# Altium PCB PCB1.PcbDoc
Units mil, origin at the board's own origin, x right, y up, seen from the top; angles counter-clockwise.
Board outline 2925 x 2520 mil, 2 copper layers (Top Layer, Bottom Layer); 12 components, 6 nets, 26 pads, 7 vias.
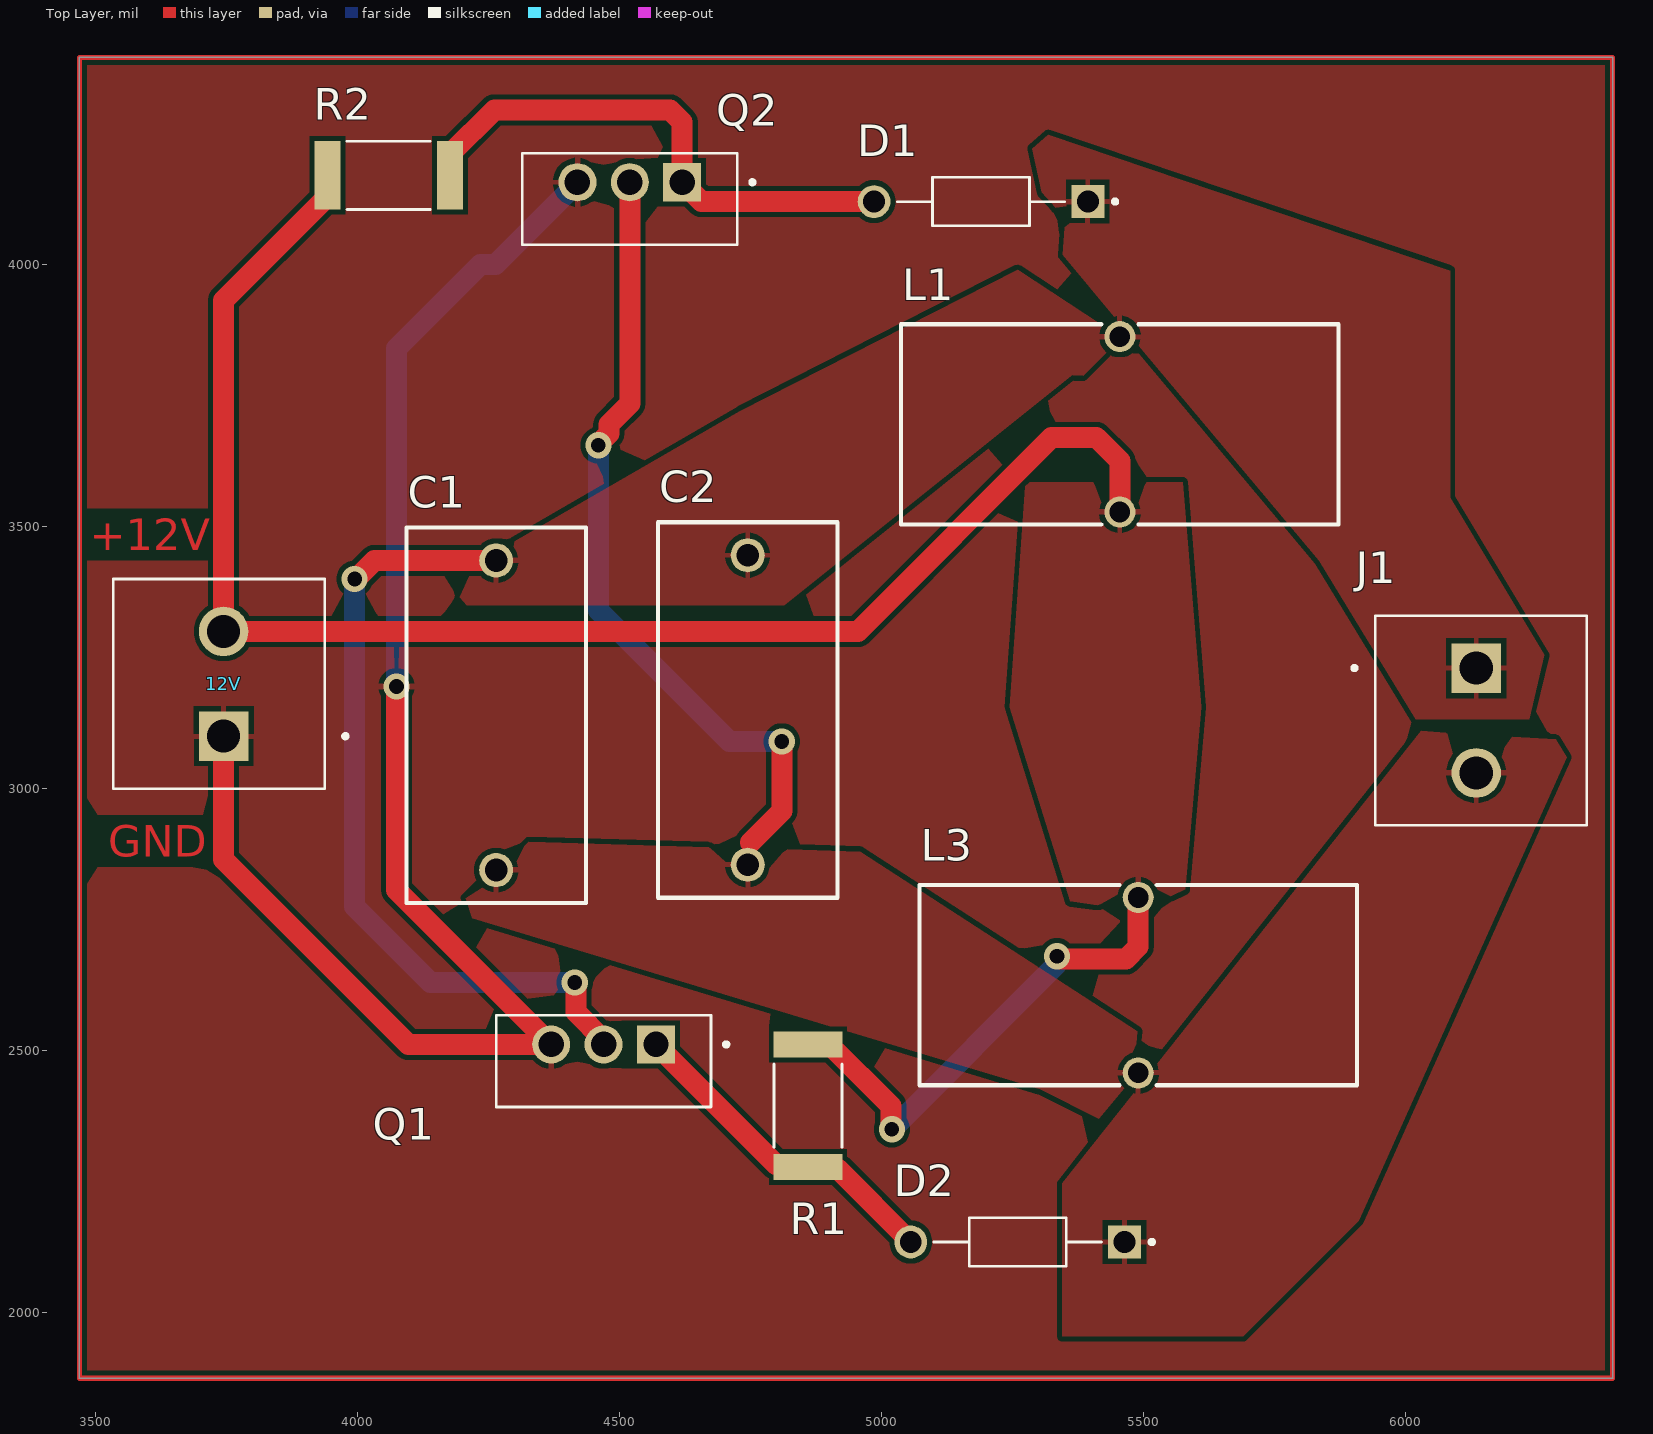
[diagram p0: Top Layer view]
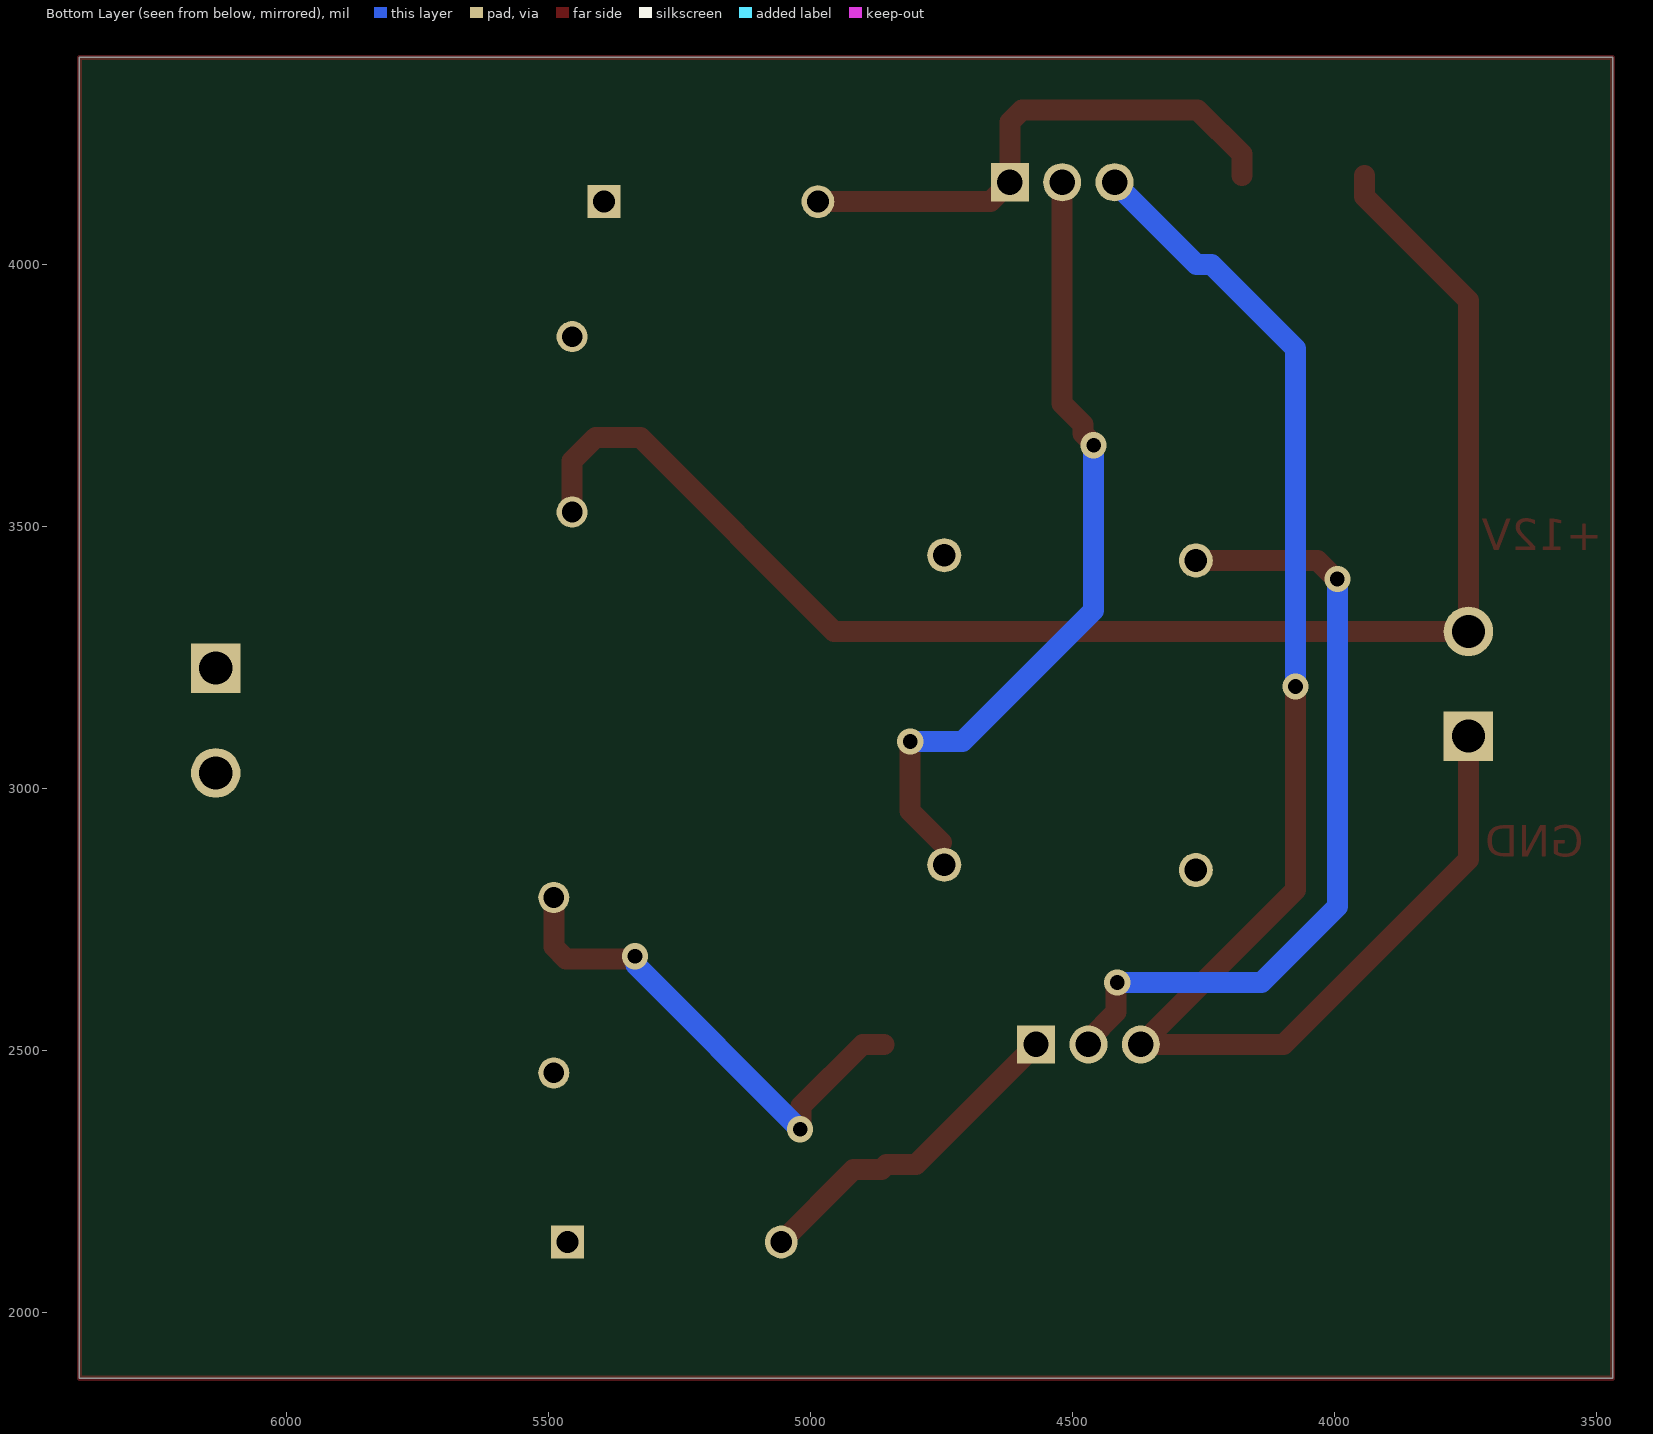
[diagram p1: Bottom Layer view, seen from below]
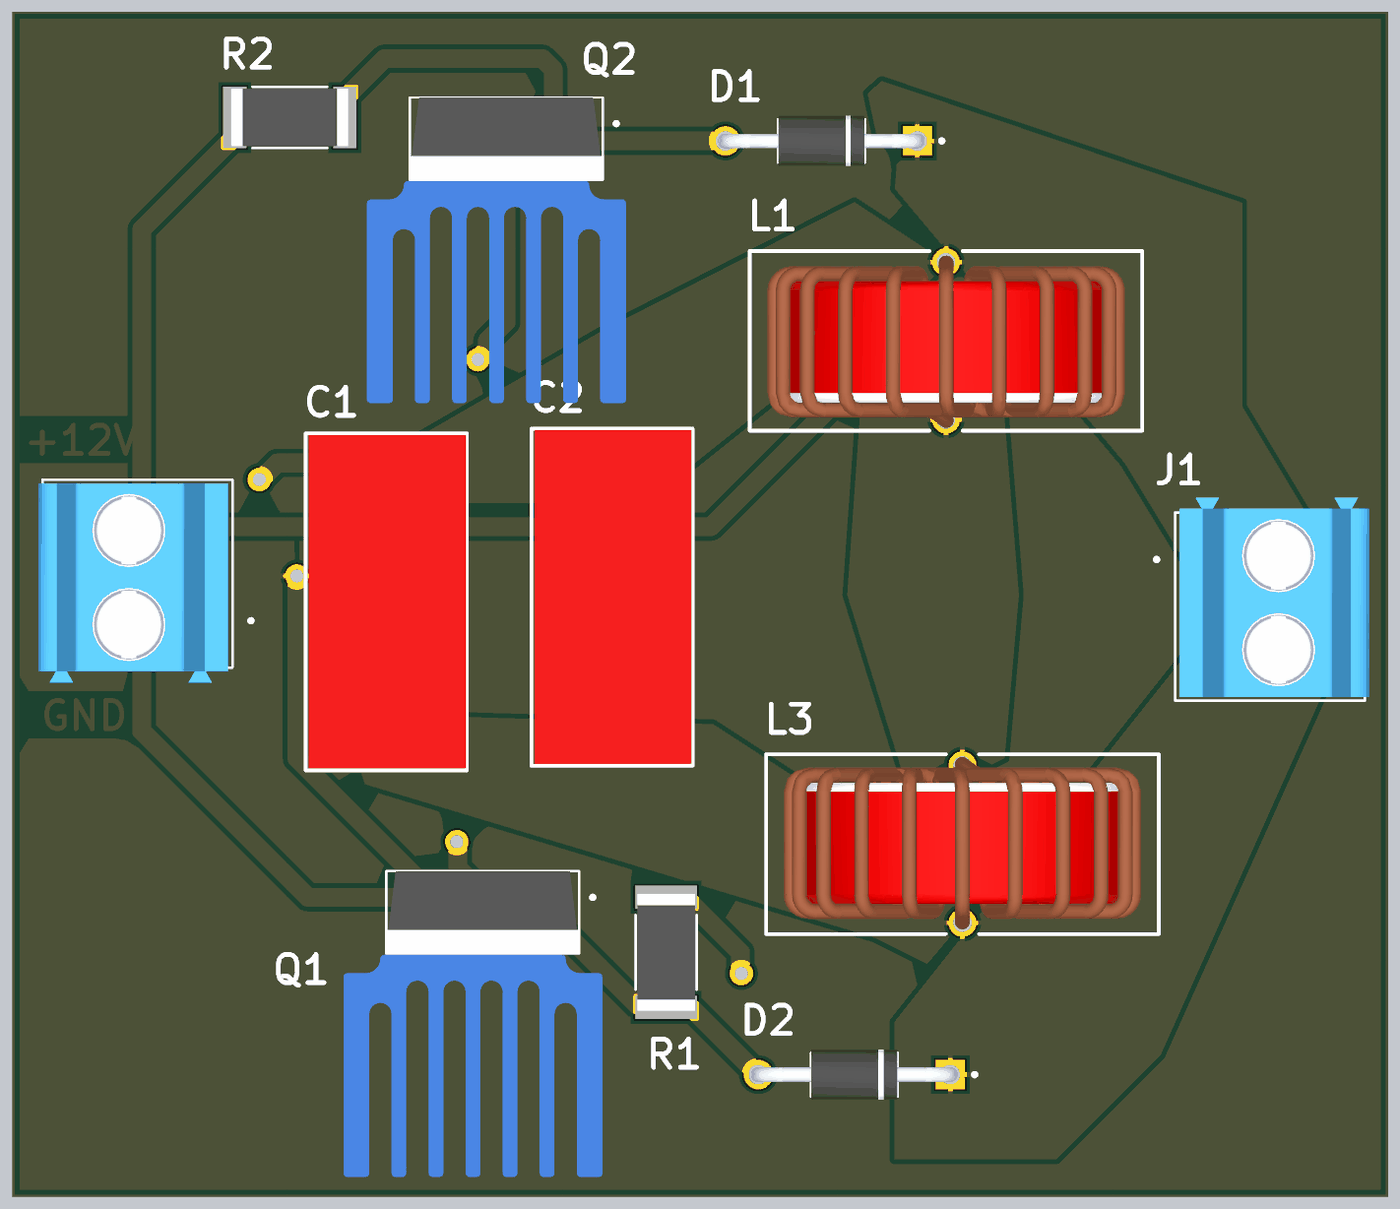
[diagram p2: 3D render of the assembled board from above, using the file's embedded part models]

## Layer stack, top to bottom
Top Solder: solder mask 0.4, Solder Resist, Dk 3.5
Top Layer: signal copper 1.4
Dielectric 1: dielectric 12.6, FR-4, Dk 4.8
Bottom Layer: signal copper 1.4
Bottom Solder: solder mask 0.4, Solder Resist, Dk 3.5

## Board outline
3470,1875 3470,4395 6395,4395 6395,1875

## Design rules (kind name [scope] priority, off if disabled: settings)
Clearance [All] p1: gap=10 ignorepadtopadclearanceinfootprint=FALSE
PolygonConnect [All] p1: connectstyle=Relief reliefconductorwidth=10 reliefentries=4 polygonreliefangle="90 Angle" airgapwidth=10
RoutingVias [All] p1: holewidth=28 width=50 viastyle="Through Hole" minholewidth=28 minwidth=50 maxholewidth=28 maxwidth=50
SolderMaskExpansion [All] p1: expansion=4 istentingtop=FALSE
SupplyNets "Schematic Supply Nets_1" [InNet('+12')] p1: voltage=0.000
SupplyNets "Schematic Supply Nets" [InNet('GND')] p2: voltage=0.000
Width [All] p1: maxlimit=40 minlimit=40 preferedwidth=40 minimp=50.000000 maximp=50.000000 favimp=50.000000
30 further rules are at their usual default settings.

## Components (designator, comment, footprint, x,y, rotation, side; value= is the part's Value field where it differs from the comment)
12V "IN" CUI_TB007-508-02BE 3745,3100 r90 top (schematic designator J2)
C1 "330nF" WCAP-FTX2_P15L18W8.5H14.5_CS 4265,3140 r90 top
C2 "330nF" WCAP-FTX2_P15L18W8.5H14.5_CS 4745,3150 r90 top
D1 "UF4007" DIOAD1036W78L470D235 5190,4120 r180 top
D2 "UF4007" DIOAD1036W78L470D235 5260,2135 r180 top
J1 "OUT" CUI_TB007-508-02BE 6135,3230 r270 top
L1 "100uH" WE-SI_744132 5455,3695 r90 top
L3 "100uH" WE-SI_744132 5490,2625 r270 top
Q1 "IRF540N" TO254P1054X469X1930-3 4470,2480 r180 top
Q2 "IRF540N" TO254P1054X469X1930-3 4520,4125 r180 top
R1 "220" RESC6331X75N 4860,2395 r270 top
R2 "220" RESC6331X75N 4060,4170 r0 top

## Footprints (in the part's own frame and the unit in brackets; to place one, negate y for a bottom-side part, rotate by r counter-clockwise, add the part's x,y. Pads: shape width x height; smd on the part's side, far side on the other; paste and mask are expansions set on the pad)
CUI_TB007-508-02BE [mm]
  rect 2.4x2.4 / inner round 2.4 / far side rect 2.4x2.4 hole 1.6: 1(0,0)
  round 2.4 hole 1.6: 2(5.08,0)
  silkscreen extent -2.54,-6 7.62,5.35, body extent -3.35,-4.66 7.41,5.59, height 14
DIOAD1036W78L470D235 [mm]
  round 1.59 hole 1.06 mask+0.102: A(5.18,0)
  rect 1.59x1.59 / inner round 1.59 / far side rect 1.59x1.59 hole 1.06 mask+0.102: C(-5.18,0)
  silkscreen extent -6.6,-1.18 4.07,1.18, body extent -5.57,-1.36 5.57,1.36, height 2.72
RESC6331X75N [mm]
  rect 1.26x3.32 smd: 1(-2.975,0) 2(2.975,0)
  silkscreen extent -2.02,-1.65 2.02,1.65, body extent -3.15,-1.55 3.15,1.55, height 0.75
TO254P1054X469X1930-3 [mm]
  rect 1.845x1.845 / inner round 1.845 / far side rect 1.845x1.845 hole 1.23: 1(-2.54,-0.811)
  round 1.845 hole 1.23: 2(0,-0.811) 3(2.54,-0.811)
  silkscreen extent -6.04,-2.22 5.21,2.22, body extent -6.48,-2.22 7.52,14.29, height 16.26
WCAP-FTX2_P15L18W8.5H14.5_CS [mm]
  round 1.65 hole 1.1: 1(-7.5,0) 2(7.5,0)
  silkscreen extent -9.1,-4.35 9.1,4.35, body extent -8.98,-4.31 9.02,4.19, height 17.61
WE-SI_744132 [mm]
  round 1.508 hole 1: 1(-4.25,0) 2(4.25,0)
  silkscreen extent -4.85,-10.6 4.85,10.6, body extent -4.7,-9.67 4.6,9.65, height 22.36

## Part data
12V J1: library part TB007-508-02BE, "2~24 Poles, Screw Type, Horizontal, 5.08 Pitch, 24~12 (AWG), Terminal Block Connector", Package=None, Check_prices=https://www.snapeda.com/parts/TB007-508-02BE/Same+Sky/view-part/?ref=eda, MF="Same Sky", MP=TB007-508-02BE, SnapEDA_Link=https://www.snapeda.com/parts/TB007-508-02BE/Same+Sky/view-part/?ref=snap
C1 C2: library part WCAP-FTX2_P15_CS, "WCAP-FTX2 Film Capacitor 330nF 275Vac", Package="Radial WÃ¼rth Elektronik", Check_prices=https://www.snapeda.com/parts/890324025034CS/W%25C3%25BCrth+Elektronik+Midcom/view-part/?ref=eda, MF="WÃ¼rth Elektronik", MP=890324025034CS, SnapEDA_Link=https://www.snapeda.com/parts/890324025034CS/W%25C3%25BCrth+Elektronik+Midcom/view-part/?ref=snap
D1 D2: "UF4007 Series 1 A 1000 V 75 ns Through Hole Fast Rectifier - DO-41", Package="DO-41 Fairchild Semiconductor", Check_prices=https://www.snapeda.com/parts/UF4007./Onsemi/view-part/?ref=eda, MF="Fairchild Semiconductor", MP=UF4007., SnapEDA_Link=https://www.snapeda.com/parts/UF4007./Onsemi/view-part/?ref=snap
L1 L3: library part WE-SI, "L = 49 ÂµH ; IR = 5.8 A; Isat = 2.2 A; RDC = 0.05 â„", Package=None, Check_prices=https://www.snapeda.com/parts/744132/Wurth+Electronics/view-part/?ref=eda, MF="Wurth Elektronik", MP=744132, SnapEDA_Link=https://www.snapeda.com/parts/744132/Wurth+Electronics/view-part/?ref=snap
Q1 Q2: "Transistor NPN MOS IRF540/IRF540N INTERNATIONAL RECTIFIER Ampere=28 V=100 TO220", Package=Package, Check_prices=https://www.snapeda.com/parts/IRF540N/Infineon/view-part/?ref=eda, MF="Infineon Technologies", MP=IRF540N, SnapEDA_Link=https://www.snapeda.com/parts/IRF540N/Infineon/view-part/?ref=snap
R1 R2: library part CR2512-JW-221ELF, "PelÃ­cula gruesa de resina 2512, 220 ohmios, 5 % 1 W, Â±200 ppm/Â°C, SMD moldeado, SMD, plÃ¡stico en relieve, T/R", Package="6331 Bourns", Check_prices=https://www.snapeda.com/parts/CR2512-JW-221ELF/Bourns/view-part/?ref=eda, MF=Bourns, MP=CR2512-JW-221ELF, SnapEDA_Link=https://www.snapeda.com/parts/CR2512-JW-221ELF/Bourns/view-part/?ref=snap

## Via types
v1: diameter 50, hole 28, Top Layer to Bottom Layer, 7 vias

## Nets (pads, with @x,y where several pads share a name; then routed paths per layer and width w, separated by ;. In a path a pad name is that pad's centre, name@x,y a point inside that pad or via, vN(x,y) a via of type N, cw(c..) or ccw(c..) an arc to the next point about the centre after c; other vN are vias at no path point)
+12: 12V.2 L1.1 L3.1 R1.1 R2.1 | length 3904.7
  Top Layer w40: R2.1 3942.87,4129.45 3745,3931.57 12V.2 4955,3300 5325,3670 5410,3670 5455,3625 L1.1 ; R1.1 4900.55,2512.13 5018.09,2394.59 5018.09,2351.91 v1(5020,2350) ; v1(5335,2680) 5337.71,2680 5342.84,2674.87 5466.57,2674.87 5490,2698.3 L3.1
  Bottom Layer w40: v1(5020,2350) 5333.09,2663.09 5333.09,2678.09 v1(5335,2680)
GND: 12V.1 Q1.3 Q2.3 | length 2932.8
  Top Layer w40: 12V.1 3745,2865 4098.09,2511.91 Q1.3 4075,2806.91 v1(4075,3195)
  Bottom Layer w40: v1(4075,3195) 4075,3840 4235.33,4000.33 4263.42,4000.33 Q2.3
NetC1_1: C1.1 C2.1 D2.C J1.2 L3.2 Q2.2 | length 1513
  Top Layer w40: v1(4460,3655) 4460,3657.71 4480,3677.71 4480,3695 4520,3735 Q2.2 ; 4750,2897.2 4810,2957.2 v1(4810,3090)
  Bottom Layer w40: v1(4460,3655) 4460,3340 4710,3090 v1(4810,3090)
NetC1_2: C1.2 C2.2 D1.C J1.1 L1.2 Q1.2 | length 1530.5
  Top Layer w40: v1(3995,3400) 3997.71,3400 4032.98,3435.28 C1.2 ; v1(4415,2630) 4416.91,2628.09 4416.91,2573.83 4470,2520.74 Q1.2
  Bottom Layer w40: v1(3995,3400) 3995,2775 4140,2630 v1(4415,2630)
NetD1_A: D1.A Q2.1 R2.2 | length 1024.1
  Top Layer w40: R2.2 4177.13,4210.55 4261.57,4295 4596.57,4295 4620,4271.57 Q2.1 4656.91,4120 D1.A
NetD2_A: D2.A Q1.1 R1.2 | length 642.2
  Top Layer w40: Q1.1 4799.23,2282.68 4855.2,2282.68 R1.2 4864.8,2273.07 4917.99,2273.07 D2.A
copper on no net: | length 10890
  Top Layer w10: 3470,1875 6395,1875 6395,4395 3470,4395 3470,1875

## Polygon pours and split planes (outlines as drawn)
GND on Top Layer "GND_L01_P029" (solid, pour order 29): 3470,4395 6395,4395 6395,1875 3470,1875
NetC1_1 on Top Layer "NETC1_1_L01_P028" (solid, pour order 28): 4270,2955 4270,2900 4960,2880 5539.61,2504.04 5360.44,2408.77 4209.52,2755.45 4187.5,2817.5 4230,2975
+12 on Top Layer "+12_L01_P010" (solid, pour order 10): 5275,3580 5280,3585 5575,3585 5610,3155 5575,2755 5360,2785 5245,3155
NetC1_2 on Top Layer "NETC1_2_L01_P016" (solid, pour order 16): 5455,3862.32 5260,3990 4730,3720 4150,3385 4185,3350 4815,3350
NetC1_2 on Top Layer "NETC1_2_L01_P017" (solid, pour order 17): 5345,3870 5442.32,3870 5455,3857.32 5382.68,3785 5345,3785 5345,3790 5300,3790
NetC1_2 on Top Layer "NETC1_2_L01_P009" (solid, pour order 9): 5326.42,4041.83 5279.89,4260.51 6085,3988.51 6085,3555 6265,3255 6235.91,3132.34 6019.67,3132.34 5835,3435
NetC1_1 on Top Layer "NETC1_1_L01_P023" (solid, pour order 23): 5290,2550 5520,2495 5415,2370 5305,2425
NetC1_1 on Top Layer "NETC1_1_L01_P012" (solid, pour order 12): 6321.58,3091.58 6030,3110 5345,2246.79 5345,1955 5690,1955 5910.98,2175.98

## Other copper
Top Layer:
  text "+12V" at 3490,3455 h60
  text "GND" at 3525,2870 h60